# Altium PCB 4110_4071_MP.PcbDoc
Units mm, origin at the board's own origin, x right, y up, seen from the top; angles counter-clockwise.
Board outline 60 x 70 mm, 2 copper layers (Top Layer, Bottom Layer); 16 components, 12 nets, 450 pads, 0 vias.
Unrouted connection lines stored in the file: 2.
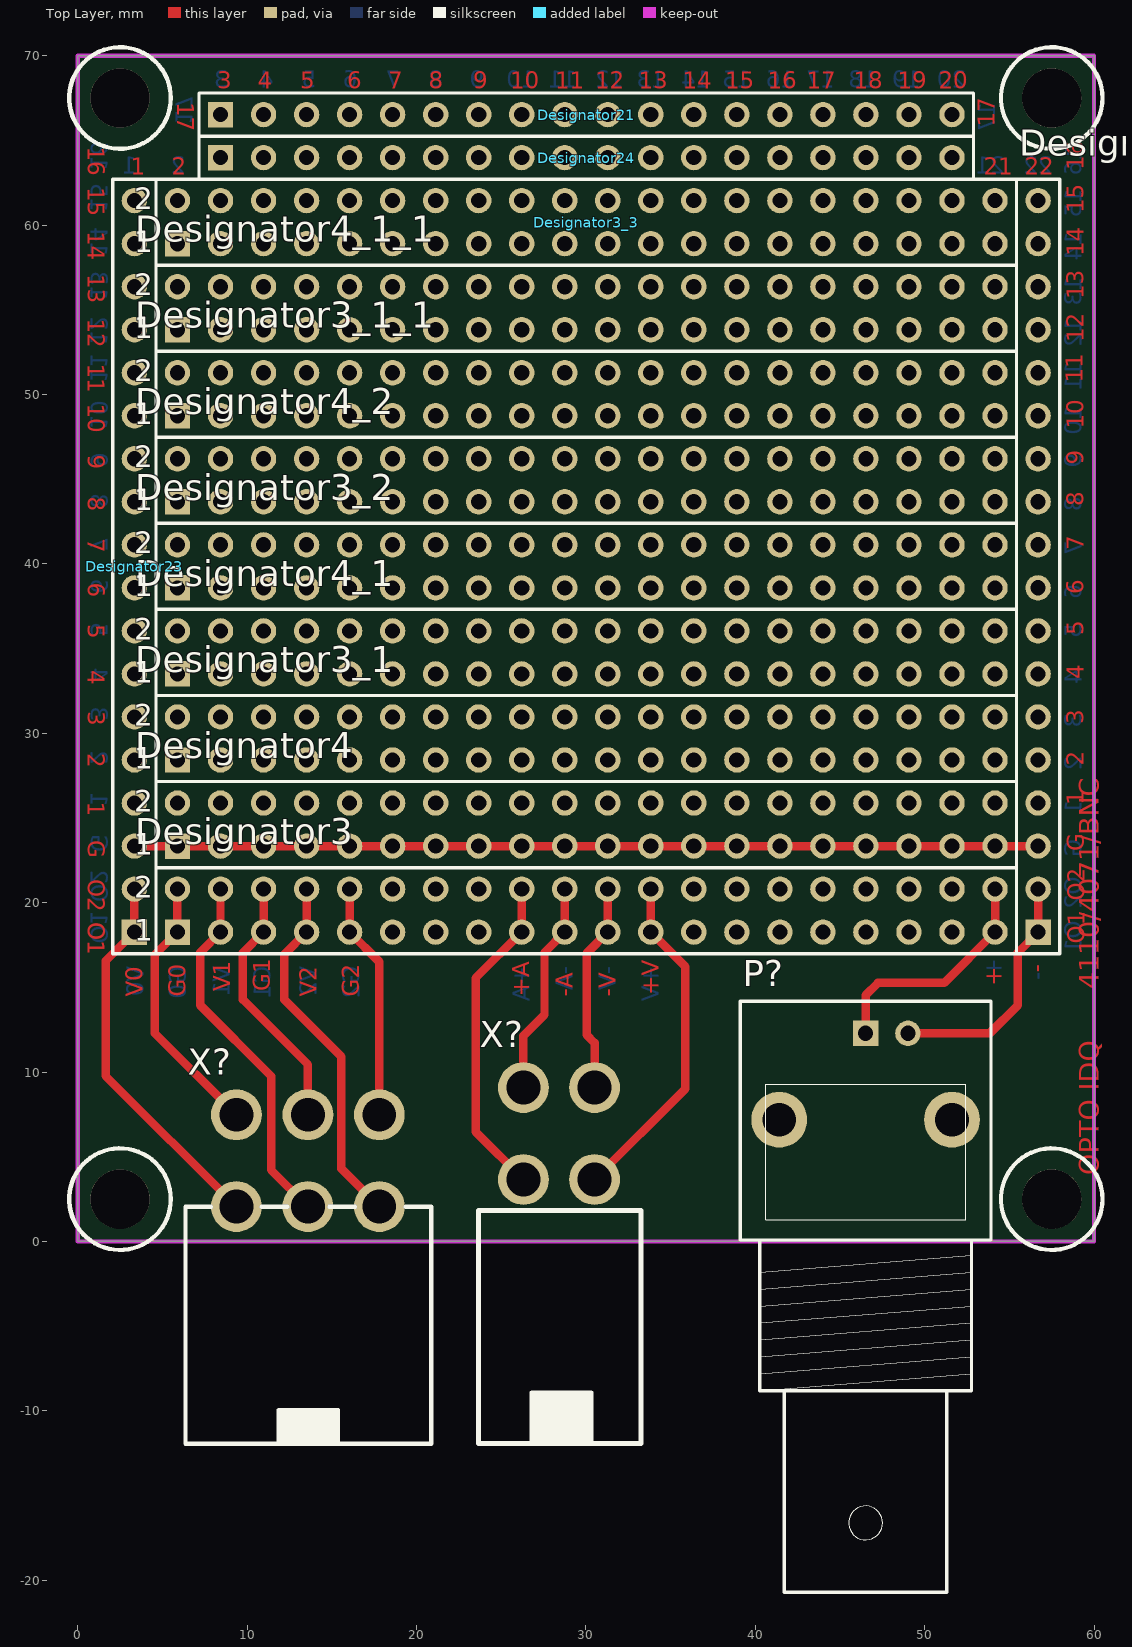
[diagram p0: Top Layer view]
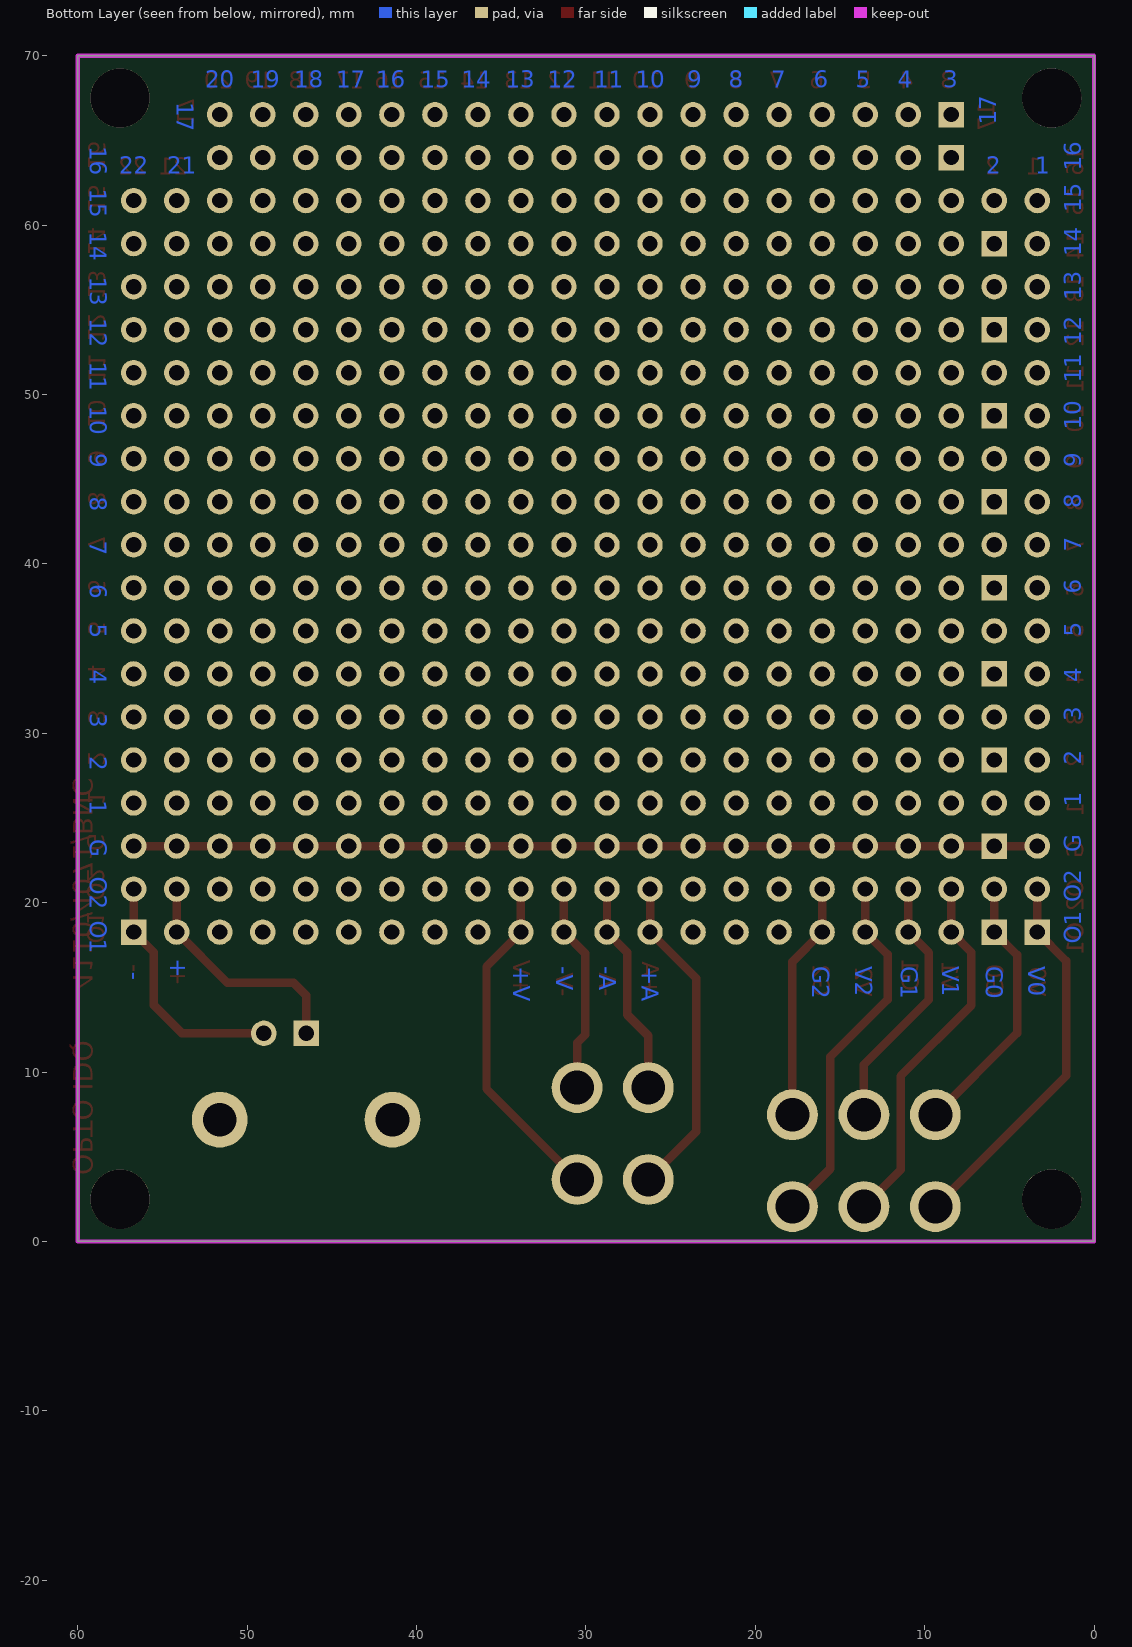
[diagram p1: Bottom Layer view, seen from below]

## Layer stack, top to bottom
Top Solder: solder mask 0.0102, Solder Resist, Dk 3.5
Top Layer: signal copper 0.0356
Dielectric 1: dielectric 0.32, FR-4, Dk 4.8
Bottom Layer: signal copper 0.0356
Bottom Solder: solder mask 0.0102, Solder Resist, Dk 3.5

## Board outline
0,0 0,70 60,70 60,0

## Design rules (kind name [scope] priority, off if disabled: settings)
BoardOutlineClearance [OnLayer('Multi-Layer')] p1: gap=0.254 ignorepadtopadclearanceinfootprint=FALSE except(0: Arc-SplitContinuation Track-SplitContinuation SMDPad-SplitContinuation THPad-SplitContinuation Via-SplitContinuation Fill-SplitContinuation Poly-SplitContinuation Region-SplitContinuation Text-SplitContinuation; 0.4: Arc-OutlineEdge Track-OutlineEdge SMDPad-OutlineEdge THPad-OutlineEdge Via-OutlineEdge Fill-OutlineEdge Poly-OutlineEdge Region-OutlineEdge Text-OutlineEdge)
Clearance [All] p1 off: gap=0.125 ignorepadtopadclearanceinfootprint=TRUE
ComponentClearance [All] p1 off: gap=0 collisioncheckmode=3 verticalgap=0 showdistances=FALSE
DiffPairsRouting [All] p1 off: maxlimit=0.254 minlimit=0.127 mostfreqgap=0.13 toplayer_minwidth=0.127 toplayer_maxwidth=0.381 toplayer_prefwidth=0.37 bottomlayer_minwidth=0.127 bottomlayer_maxwidth=0.381 bottomlayer_prefwidth=0.37 maxuncoupledlength=12.7
FanoutControl Fanout_BGA [IsBGA] p1 off: bgadir=Out bgaviamode=Centered fanoutstyle=Auto fanoutdirection=Alternating viagrid=0.025 // Fanout_BGA (Default Rule)
FanoutControl Fanout_LCC [IsLCC] p2 off: bgadir=Out bgaviamode=Centered fanoutstyle=Auto fanoutdirection=Alternating viagrid=0.025 // Fanout_LCC (Default Rule)
FanoutControl Fanout_SOIC [IsSOIC] p3 off: bgadir=Out bgaviamode=Centered fanoutstyle=Auto fanoutdirection=Alternating viagrid=0.025 // Fanout_SOIC (Default Rule)
FanoutControl Fanout_Small [(CompPinCount < 5)] p4 off: bgadir=Out bgaviamode=Centered fanoutstyle=Auto fanoutdirection=OutThenIn viagrid=0.025 // Fanout_Small (Default Rule)
FanoutControl Fanout_Default [All] p5 off: bgadir=Out bgaviamode=Centered fanoutstyle=Auto fanoutdirection=Alternating viagrid=0.025 // Fanout_Default (Default Rule)
HoleSize [All] p1: absolutevalues=TRUE maxlimit=5 minlimit=0.3 maxpercent=80.000 minpercent=20.000
MinimumSolderMaskSliver [All] p1: minsoldermaskwidth=0.1
PlaneClearance [All] p1: clearance=1
PolygonConnect [All] p1: connectstyle=Relief reliefconductorwidth=0.254 reliefentries=4 polygonreliefangle="90 Angle" airgapwidth=0.254
RoutingCorners [All] p1 off: cornerstyle=45-Degree minsetback=2.54 maxsetback=2.54
RoutingLayers [All] p1 off: top layer_v5=TRUE bottom layer_v5=TRUE
RoutingPriority [All] p1 off: routingpriority=0
RoutingTopology [All] p1 off: topology=Shortest
RoutingVias [All] p1 off: holewidth=0.3 width=1.27 viastyle="Through Hole" minholewidth=0.3 minwidth=0.6 maxholewidth=0.711 maxwidth=1.27
ShortCircuit [All] p1 off: allowed=FALSE
SilkToSilkClearance [All] p1 off: silktosilkclearance=0
SilkToSolderMaskClearance [IsPad] p1 off: minsilkscreentomaskgap=0 clearancetoexposedcopper=TRUE
SolderMaskExpansion [All] p1: expansion=0.102 istentingtop=FALSE
UnRoutedNet [All] p1 off: checkbadconnections=TRUE
UnpouredPolygon [All] p1 off:
Width [All] p1 off: maxlimit=2.5 minlimit=0.125 preferedwidth=0.37
11 further rules are at their usual default settings.

## Classes and differential pairs
component class Sheet1: P? X?

## Components (designator, comment, footprint, x,y, rotation, side; value= is the part's Value field where it differs from the comment)
Designator3 "Comment" HDR2X20 5.893,18.263 r0 top
Designator3_1 "Comment" HDR2X20 5.893,28.423 r0 top
Designator3_1_1 "Comment" HDR2X20 5.893,48.743 r0 top
Designator3_2 "Comment" HDR2X20 5.893,38.583 r0 top
Designator3_3 "Comment" HDR2X20 5.893,58.903 r0 top
Designator4 "Comment" HDR2X20 5.893,23.343 r0 top
Designator4_1 "Comment" HDR2X20 5.893,33.503 r0 top
Designator4_1_1 "Comment" HDR2X20 5.893,53.823 r0 top
Designator4_2 "Comment" HDR2X20 5.893,43.663 r0 top
Designator21 "Comment" HDR1X18 8.433,66.523 r0 top
Designator22 "Comment" HDR1X18 56.693,18.263 r90 top
Designator23 "Comment" HDR1X18 3.352,18.263 r90 top
Designator24 "Comment" HDR1X18 8.433,63.983 r0 top
P? "BNC" "BNC_RA CON" 46.513,12.288 r90 top
X? "AMPVOLT" AMP_VOLTMETER 26.314,9.081 r0 top
X? "POWER" POWER 9.372,2.058 r180 top

## Footprints (in the part's own frame and the unit in brackets; to place one, negate y for a bottom-side part, rotate by r counter-clockwise, add the part's x,y. Pads: shape width x height; smd on the part's side, far side on the other; paste and mask are expansions set on the pad)
AMP_VOLTMETER [mm] "AMP_VOLTMETER"
  round 3 hole 2: 1(0,0) 2(0,-5.423) 3(4.2,-5.423) 4(4.2,0)
  silkscreen extent -2.66,-21 6.94,-7.25
"BNC_RA CON" [mm] "Connector; BNC Elbow"
  rect 1.5x1.5 hole 0.9: 1(0,0)
  round 3.3 hole 2: 2(-5.1,-5.1) 2(-5.1,5.1)
  round 1.5 hole 0.9: 2(0,-2.5)
  silkscreen extent -33,-7.4 1.9,7.4
HDR1X18 [mm] "Connector; Header; 18 Position"
  rect 1.5x1.5 hole 0.9: 1(0,0)
  round 1.5 hole 0.9: 2(2.54,0) 3(5.08,0) 4(7.62,0) 5(10.16,0) 6(12.7,0) 7(15.24,0) 8(17.78,0) 9(20.32,0) 10(22.86,0) 11(25.4,0) 12(27.94,0) 13(30.48,0) 14(33.02,0) 15(35.56,0) 16(38.1,0) 17(40.64,0) 18(43.18,0)
  silkscreen extent -1.27,-1.27 44.45,1.27
HDR2X20 [mm] "Connector; Header; 20x2 Position"
  rect 1.5x1.5 hole 0.9: 1(0,0)
  round 1.5 hole 0.9: 2(0,2.54) 3(2.54,0) 4(2.54,2.54) 5(5.08,0) 6(5.08,2.54) 7(7.62,0) 8(7.62,2.54) 9(10.16,0) 10(10.16,2.54) 11(12.7,0) 12(12.7,2.54) 13(15.24,0) 14(15.24,2.54) 15(17.78,0) 16(17.78,2.54) 17(20.32,0) 18(20.32,2.54) 19(22.86,0) 20(22.86,2.54) 21(25.4,0) 22(25.4,2.54) 23(27.94,0) 24(27.94,2.54) 25(30.48,0) 26(30.48,2.54) 27(33.02,0) 28(33.02,2.54) 29(35.56,0) 30(35.56,2.54) 31(38.1,0) 32(38.1,2.54) 33(40.64,0) 34(40.64,2.54) 35(43.18,0) 36(43.18,2.54) 37(45.72,0) 38(45.72,2.54) 39(48.26,0) 40(48.26,2.54)
  silkscreen extent -1.27,-1.27 49.53,3.81
POWER [mm] "POWER"
  round 3 hole 2: 1(0,0) 2(-4.217,0) 3(-8.435,0) 4(-8.435,-5.422) 5(-4.217,-5.422) 6(0,-5.422)
  silkscreen extent -11.5,0 3,14

## Part data
P?: "BNC Elbow Connector", LatestRevisionDate=17-Jul-2002, LatestRevisionNote="Re-released for DXP Platform.", Publisher="Altium Limited"
X?: library part AMP_VOLTMETER

## Free pads (board coordinates)
  round 3.5 hole 3.5 unplated: 38(2.5,2.5) 38(2.5,67.5) 38(57.5,2.5) 38(57.5,67.5)

## Nets (pads, with @x,y where several pads share a name; then routed paths per layer and width w, separated by ;. In a path a pad name is that pad's centre, name@x,y a point inside that pad or via, vN(x,y) a via of type N, cw(c..) or ccw(c..) an arc to the next point about the centre after c; other vN are vias at no path point)
0: X?.1@9.372,2.058
1: X?.2@13.589,2.058 | length 8.6
  Top Layer w0.5: 11.417,9.766 11.417,4.229 X?.2@13.589,2.058
2: X?.3@17.806,2.058 | length 9.8
  Top Layer w0.5: 15.57,10.909 15.57,4.294 X?.3@17.806,2.058
+: P?.1
+A: X?.2@26.314,3.658
+V: X?.3@30.514,3.658 | length 17.7
  Top Layer w0.5: X?.3@30.514,3.658 35.865,9.008 35.865,16.231 33.833,18.263
-: P?.2
-A: X?.1@26.314,9.081 | length 3.1
  Top Layer w0.5: X?.1@26.314,9.081 26.314,12.141
-V: X?.4@30.514,9.081 | length 9.9
  Top Layer w0.5: X?.4@30.514,9.081 30.514,11.726 30.048,12.192 30.048,17.018 31.293,18.263
GND0: X?.6
GND1: X?.5 | length 8.4
  Top Layer w0.5: 9.754,14.275 13.589,10.439 X?.5
GND2: X?.4@17.806,7.48
pads on no net: Designator3.1 Designator3.2 Designator3.3 Designator3.4 Designator3.5 Designator3.6 Designator3.7 Designator3.8 Designator3.9 Designator3.10 Designator3.11 Designator3.12 Designator3.13 Designator3.14 Designator3.15 Designator3.16 Designator3.17 Designator3.18 Designator3.19 Designator3.20 Designator3.21 Designator3.22 Designator3.23 Designator3.24 Designator3.25 Designator3.26 Designator3.27 Designator3.28 Designator3.29 Designator3.30 Designator3.31 Designator3.32 Designator3.33 Designator3.34 Designator3.35 Designator3.36 Designator3.37 Designator3.38 Designator3.39 Designator3.40 Designator3_1.1 Designator3_1.2 Designator3_1.3 Designator3_1.4 Designator3_1.5 Designator3_1.6 Designator3_1.7 Designator3_1.8 Designator3_1.9 Designator3_1.10 Designator3_1.11 Designator3_1.12 Designator3_1.13 Designator3_1.14 Designator3_1.15 Designator3_1.16 Designator3_1.17 Designator3_1.18 Designator3_1.19 Designator3_1.20 Designator3_1.21 Designator3_1.22 Designator3_1.23 Designator3_1.24 Designator3_1.25 Designator3_1.26 Designator3_1.27 Designator3_1.28 Designator3_1.29 Designator3_1.30 Designator3_1.31 Designator3_1.32 Designator3_1.33 Designator3_1.34 Designator3_1.35 Designator3_1.36 Designator3_1.37 Designator3_1.38 Designator3_1.39 Designator3_1.40 Designator3_1_1.1 Designator3_1_1.2 Designator3_1_1.3 Designator3_1_1.4 Designator3_1_1.5 Designator3_1_1.6 Designator3_1_1.7 Designator3_1_1.8 Designator3_1_1.9 Designator3_1_1.10 Designator3_1_1.11 Designator3_1_1.12 Designator3_1_1.13 Designator3_1_1.14 Designator3_1_1.15 Designator3_1_1.16 Designator3_1_1.17 Designator3_1_1.18 Designator3_1_1.19 Designator3_1_1.20 Designator3_1_1.21 Designator3_1_1.22 Designator3_1_1.23 Designator3_1_1.24 Designator3_1_1.25 Designator3_1_1.26 Designator3_1_1.27 Designator3_1_1.28 Designator3_1_1.29 Designator3_1_1.30 Designator3_1_1.31 Designator3_1_1.32 Designator3_1_1.33 Designator3_1_1.34 Designator3_1_1.35 Designator3_1_1.36 Designator3_1_1.37 Designator3_1_1.38 Designator3_1_1.39 Designator3_1_1.40 Designator3_2.1 Designator3_2.2 Designator3_2.3 Designator3_2.4 Designator3_2.5 Designator3_2.6 Designator3_2.7 Designator3_2.8 Designator3_2.9 Designator3_2.10 Designator3_2.11 Designator3_2.12 Designator3_2.13 Designator3_2.14 Designator3_2.15 Designator3_2.16 Designator3_2.17 Designator3_2.18 Designator3_2.19 Designator3_2.20 Designator3_2.21 Designator3_2.22 Designator3_2.23 Designator3_2.24 Designator3_2.25 Designator3_2.26 Designator3_2.27 Designator3_2.28 Designator3_2.29 Designator3_2.30 Designator3_2.31 Designator3_2.32 Designator3_2.33 Designator3_2.34 Designator3_2.35 Designator3_2.36 Designator3_2.37 Designator3_2.38 Designator3_2.39 Designator3_2.40 Designator3_3.1 Designator3_3.2 Designator3_3.3 Designator3_3.4 Designator3_3.5 Designator3_3.6 Designator3_3.7 Designator3_3.8 Designator3_3.9 Designator3_3.10 Designator3_3.11 Designator3_3.12 Designator3_3.13 Designator3_3.14 Designator3_3.15 Designator3_3.16 Designator3_3.17 Designator3_3.18 Designator3_3.19 Designator3_3.20 Designator3_3.21 Designator3_3.22 Designator3_3.23 Designator3_3.24 Designator3_3.25 Designator3_3.26 Designator3_3.27 Designator3_3.28 Designator3_3.29 Designator3_3.30 Designator3_3.31 Designator3_3.32 Designator3_3.33 Designator3_3.34 Designator3_3.35 Designator3_3.36 Designator3_3.37 Designator3_3.38 Designator3_3.39 Designator3_3.40 Designator4.1 Designator4.2 Designator4.3 Designator4.4 Designator4.5 Designator4.6 Designator4.7 Designator4.8 Designator4.9 Designator4.10 Designator4.11 Designator4.12 Designator4.13 Designator4.14 Designator4.15 Designator4.16 Designator4.17 Designator4.18 Designator4.19 Designator4.20 Designator4.21 Designator4.22 Designator4.23 Designator4.24 Designator4.25 Designator4.26 Designator4.27 Designator4.28 Designator4.29 Designator4.30 Designator4.31 Designator4.32 Designator4.33 Designator4.34 Designator4.35 Designator4.36 Designator4.37 Designator4.38 Designator4.39 Designator4.40 Designator4_1.1 Designator4_1.2 Designator4_1.3 Designator4_1.4 Designator4_1.5 Designator4_1.6 Designator4_1.7 Designator4_1.8 Designator4_1.9 Designator4_1.10 Designator4_1.11 Designator4_1.12 Designator4_1.13 Designator4_1.14 Designator4_1.15 Designator4_1.16 Designator4_1.17 Designator4_1.18 Designator4_1.19 Designator4_1.20 Designator4_1.21 Designator4_1.22 Designator4_1.23 Designator4_1.24 Designator4_1.25 Designator4_1.26 Designator4_1.27 Designator4_1.28 Designator4_1.29 Designator4_1.30 Designator4_1.31 Designator4_1.32 Designator4_1.33 Designator4_1.34 Designator4_1.35 Designator4_1.36 Designator4_1.37 Designator4_1.38 Designator4_1.39 Designator4_1.40 Designator4_1_1.1 Designator4_1_1.2 Designator4_1_1.3 Designator4_1_1.4 Designator4_1_1.5 Designator4_1_1.6 Designator4_1_1.7 Designator4_1_1.8 Designator4_1_1.9 Designator4_1_1.10 Designator4_1_1.11 Designator4_1_1.12 Designator4_1_1.13 Designator4_1_1.14 Designator4_1_1.15 Designator4_1_1.16 Designator4_1_1.17 Designator4_1_1.18 Designator4_1_1.19 Designator4_1_1.20 Designator4_1_1.21 Designator4_1_1.22 Designator4_1_1.23 Designator4_1_1.24 Designator4_1_1.25 Designator4_1_1.26 Designator4_1_1.27 Designator4_1_1.28 Designator4_1_1.29 Designator4_1_1.30 Designator4_1_1.31 Designator4_1_1.32 Designator4_1_1.33 Designator4_1_1.34 Designator4_1_1.35 Designator4_1_1.36 Designator4_1_1.37 Designator4_1_1.38 Designator4_1_1.39 Designator4_1_1.40 Designator4_2.1 Designator4_2.2 Designator4_2.3 Designator4_2.4 Designator4_2.5 Designator4_2.6 Designator4_2.7 Designator4_2.8 Designator4_2.9 Designator4_2.10 Designator4_2.11 Designator4_2.12 Designator4_2.13 Designator4_2.14 Designator4_2.15 Designator4_2.16 Designator4_2.17 Designator4_2.18 Designator4_2.19 Designator4_2.20 Designator4_2.21 Designator4_2.22 Designator4_2.23 Designator4_2.24 Designator4_2.25 Designator4_2.26 Designator4_2.27 Designator4_2.28 Designator4_2.29 Designator4_2.30 Designator4_2.31 Designator4_2.32 Designator4_2.33 Designator4_2.34 Designator4_2.35 Designator4_2.36 Designator4_2.37 Designator4_2.38 Designator4_2.39 Designator4_2.40 Designator21.1 Designator21.2 Designator21.3 Designator21.4 Designator21.5 Designator21.6 Designator21.7 Designator21.8 Designator21.9 Designator21.10 Designator21.11 Designator21.12 Designator21.13 Designator21.14 Designator21.15 Designator21.16 Designator21.17 Designator21.18 Designator22.1 Designator22.2 Designator22.3 Designator22.4 Designator22.5 Designator22.6 Designator22.7 Designator22.8 Designator22.9 Designator22.10 Designator22.11 Designator22.12 Designator22.13 Designator22.14 Designator22.15 Designator22.16 Designator22.17 Designator22.18 Designator23.1 Designator23.2 Designator23.3 Designator23.4 Designator23.5 Designator23.6 Designator23.7 Designator23.8 Designator23.9 Designator23.10 Designator23.11 Designator23.12 Designator23.13 Designator23.14 Designator23.15 Designator23.16 Designator23.17 Designator23.18 Designator24.1 Designator24.2 Designator24.3 Designator24.4 Designator24.5 Designator24.6 Designator24.7 Designator24.8 Designator24.9 Designator24.10 Designator24.11 Designator24.12 Designator24.13 Designator24.14 Designator24.15 Designator24.16 Designator24.17 Designator24.18
copper on no net: | length 200.8
  Top Layer w0.381: 49.073,18.263 49.093,18.263
  Top Layer w0.5: 3.352,20.803 3.352,18.263 1.651,16.562 1.651,9.778 9.372,2.058 ; 3.352,23.343 56.693,23.343 ; 5.893,20.803 5.893,18.263 4.547,16.916 4.547,12.305 9.372,7.48 ; 8.433,20.803 8.433,18.263 7.239,17.069 7.239,13.945 11.417,9.766 ; 9.754,14.275 9.754,17.043 10.973,18.263 10.973,20.803 ; 13.513,20.803 13.513,18.263 12.192,16.942 12.192,14.275 15.557,10.909 ; 16.053,20.803 16.053,18.263 17.806,16.509 17.806,7.48 ; 26.213,20.803 26.213,18.263 23.495,15.545 23.495,6.477 26.314,3.658 ; 26.314,12.141 27.559,13.386 27.559,17.069 28.753,18.263 28.753,20.803 ; 31.293,18.263 31.293,20.803 ; 33.833,18.263 33.833,20.803 ; 46.513,12.288 46.513,14.534 47.244,15.265 51.156,15.265 54.153,18.263 54.153,20.803 ; 49.013,12.288 53.843,12.288 55.499,13.945 55.499,17.069 56.693,18.263 56.693,20.803

## Keep-outs
Keep-Out Layer:
  the board outline again, w0.254

## Other copper
Top Layer:
  text "3" at 8.227,68.044 h1
  text "4" at 10.64,68.044 h1
  text "5" at 13.129,68.044 h1
  text "6" at 15.923,68.044 h1
  text "7" at 18.336,68.044 h1
  text "8" at 20.724,68.044 h1
  text "9" at 23.34,68.044 h1
  text "10" at 25.55,68.044 h1
  text "11" at 28.192,68.044 h1
  text "12" at 30.554,68.044 h1
  text "13" at 33.119,68.044 h1
  text "14" at 35.71,68.044 h1
  text "15" at 38.225,68.044 h1
  text "16" at 40.739,68.044 h1
  text "17" at 43.051,68.044 h1
  text "18" at 45.819,68.044 h1
  text "19" at 48.41,68.044 h1
  text "20" at 50.823,68.044 h1
  text "17" at 5.865,67.262 h1 r270
  text "17" at 54.13,65.809 h1 r90
  text "16" at 0.6,64.62 h1 r270
  text "16" at 59.388,63.244 h1 r90
  text "1" at 3.147,62.965 h1
  text "2" at 5.56,62.965 h1
  text "21" at 53.49,62.965 h1
  text "22" at 55.903,62.965 h1
  text "15" at 0.6,62.225 h1 r270
  text "15" at 59.388,60.689 h1 r90
  text "14" at 0.6,59.625 h1 r270
  text "14" at 59.388,58.149 h1 r90
  text "13" at 0.6,57.1 h1 r270
  text "13" at 59.388,55.609 h1 r90
  text "12" at 0.6,54.475 h1 r270
  text "12" at 59.388,53.069 h1 r90
  text "11" at 0.6,51.825 h1 r270
  text "11" at 59.337,50.696 h1 r90
  text "10" at 0.6,49.45 h1 r270
  text "10" at 59.388,47.989 h1 r90
  text "9" at 0.6,46.443 h1 r270
  text "9" at 59.388,45.856 h1 r90
  text "8" at 0.6,43.954 h1 r270
  text "8" at 59.388,43.392 h1 r90
  text "7" at 0.6,41.5 h1 r270
  text "7" at 59.388,40.801 h1 r90
  text "6" at 0.6,38.9 h1 r270
  text "6" at 59.388,38.21 h1 r90
  text "5" at 0.6,36.425 h1 r270
  text "5" at 59.388,35.797 h1 r90
  text "4" at 0.6,33.734 h1 r270
  text "4" at 59.388,33.181 h1 r90
  text "3" at 0.6,31.305 h1 r270
  text "3" at 59.388,30.54 h1 r90
  text "2" at 0.6,28.816 h1 r270
  text "2" at 59.388,28.076 h1 r90
  text "1" at 0.6,25.971 h1 r270
  text "1" at 59.388,25.753 h1 r90
  text "G" at 0.6,23.675 h1 r270
  text "G" at 59.425,23.05 h1 r90
  text "O2" at 0.6,21.389 h1 r270
  text "O2" at 59.438,20.114 h1 r90
  text "O1" at 0.6,18.849 h1 r270
  text "O1" at 0.6,18.849 h1 r270
  text "O1" at 59.438,17.574 h1 r90
  text "-" at 56.312,16.358 h1 r270
  text "+" at 53.654,16.208 h1 r270
  text "V1" at 8.994,14.767 h1 r90
  text "G1" at 11.356,14.767 h1 r90
  text "+V" at 34.292,14.541 h1 r90
  text "V0" at 3.838,14.434 h1 r90
  text "G0" at 6.378,14.434 h1 r90
  text "V2" at 14.099,14.434 h1 r90
  text "G2" at 16.614,14.434 h1 r90
  text "+A" at 26.672,14.434 h1 r90
  text "-A" at 29.212,14.434 h1 r90
  text "-V" at 31.752,14.434 h1 r90
  text "OPTO IDQ      4110/4071/BNC" at 60.655,3.914 h2 r90
Bottom Layer:
  text "3" at 8.918,68.095 h1
  text "4" at 11.585,68.095 h1
  text "5" at 14.074,68.095 h1
  text "6" at 16.538,68.095 h1
  text "7" at 19.052,68.095 h1
  text "8" at 21.567,68.095 h1
  text "9" at 24.005,68.095 h1
  text "10" at 27.053,68.095 h1
  text "11" at 29.492,68.095 h1
  text "12" at 32.26,68.095 h1
  text "13" at 34.724,68.095 h1
  text "14" at 37.34,68.095 h1
  text "15" at 39.753,68.095 h1
  text "16" at 42.37,68.095 h1
  text "17" at 44.732,68.095 h1
  text "18" at 47.221,68.095 h1
  text "19" at 49.786,68.095 h1
  text "20" at 52.453,68.095 h1
  text "17" at 54.155,67.236 h1 r90
  text "17" at 5.789,65.936 h1 r270
  text "16" at 59.286,64.645 h1 r90
  text "16" at 0.76,63.218 h1 r270
  text "1" at 3.482,63.04 h1
  text "2" at 6.352,63.04 h1
  text "21" at 54.714,63.04 h1
  text "22" at 57.534,63.016 h1
  text "15" at 59.286,62.131 h1 r90
  text "15" at 0.76,60.754 h1 r270
  text "14" at 59.286,59.591 h1 r90
  text "14" at 0.76,58.164 h1 r270
  text "13" at 59.286,56.96 h1 r90
  text "13" at 0.76,55.573 h1 r270
  text "12" at 59.286,54.511 h1 r90
  text "12" at 0.76,52.906 h1 r270
  text "11" at 59.286,51.92 h1 r90
  text "11" at 0.76,50.696 h1 r270
  text "10" at 59.286,49.329 h1 r90
  text "10" at 0.76,47.927 h1 r270
  text "9" at 59.286,46.535 h1 r90
  text "9" at 0.76,45.718 h1 r270
  text "8" at 59.286,43.97 h1 r90
  text "8" at 0.76,43.279 h1 r270
  text "7" at 59.286,41.379 h1 r90
  text "7" at 0.76,40.714 h1 r270
  text "6" at 59.286,38.788 h1 r90
  text "6" at 0.76,38.225 h1 r270
  text "5" at 59.286,36.477 h1 r90
  text "5" at 0.76,35.71 h1 r270
  text "4" at 59.286,33.759 h1 r90
  text "4" at 0.76,33.018 h1 r270
  text "3" at 59.286,31.168 h1 r90
  text "3" at 0.76,30.706 h1 r270
  text "2" at 59.286,28.654 h1 r90
  text "2" at 0.76,28.141 h1 r270
  text "1" at 59.286,26.037 h1 r90
  text "1" at 0.76,25.677 h1 r270
  text "G" at 59.286,23.751 h1 r90
  text "G" at 0.76,22.985 h1 r270
  text "O2" at 59.286,21.542 h1 r90
  text "O2" at 0.76,20.013 h1 r270
  text "O1" at 59.286,18.925 h1 r90
  text "O1" at 0.76,17.574 h1 r270
  text "V0" at 3.889,16.234 h1 r90
  text "G0" at 6.403,16.234 h1 r90
  text "V1" at 8.969,16.234 h1 r90
  text "G1" at 11.407,16.234 h1 r90
  text "V2" at 14.099,16.234 h1 r90
  text "G2" at 16.639,16.234 h1 r90
  text "+A" at 26.698,16.234 h1 r90
  text "-A" at 29.212,16.234 h1 r90
  text "-V" at 31.752,16.234 h1 r90
  text "+V" at 34.292,16.234 h1 r90
  text "+" at 53.654,15.568 h1 r270
  text "-" at 56.337,15.418 h1 r270

## Silkscreen, mask and mechanical layers (free items; w line width, h text height)
Top Overlay:
  circle w0.254: c57.5,67.5 r3
  circle w0.254: c2.5,67.5 r3
  circle w0.254: c57.5,2.5 r3
  circle w0.254: c2.5,2.5 r3

## Text inside footprints (layer, text, board x,y; h text height)
Designator3: Top Overlay "2" at 3.353,20.295 h1.27; Top Overlay "1" at 3.353,17.755 h1.27
Designator3_1: Top Overlay "2" at 3.353,30.455 h1.27; Top Overlay "1" at 3.353,27.915 h1.27
Designator3_1_1: Top Overlay "1" at 3.353,48.235 h1.27; Top Overlay "2" at 3.353,50.775 h1.27
Designator3_2: Top Overlay "2" at 3.353,40.615 h1.27; Top Overlay "1" at 3.353,38.075 h1.27
Designator3_3: Top Overlay "1" at 3.353,58.395 h1.27; Top Overlay "2" at 3.353,60.935 h1.27
Designator4: Top Overlay "2" at 3.353,25.375 h1.27; Top Overlay "1" at 3.353,22.835 h1.27
Designator4_1: Top Overlay "2" at 3.353,35.535 h1.27; Top Overlay "1" at 3.353,32.995 h1.27
Designator4_1_1: Top Overlay "1" at 3.353,53.315 h1.27; Top Overlay "2" at 3.353,55.855 h1.27
Designator4_2: Top Overlay "2" at 3.353,45.695 h1.27; Top Overlay "1" at 3.353,43.155 h1.27